# EAGLE board flextimus-prime (EAGLE 8.4.0)
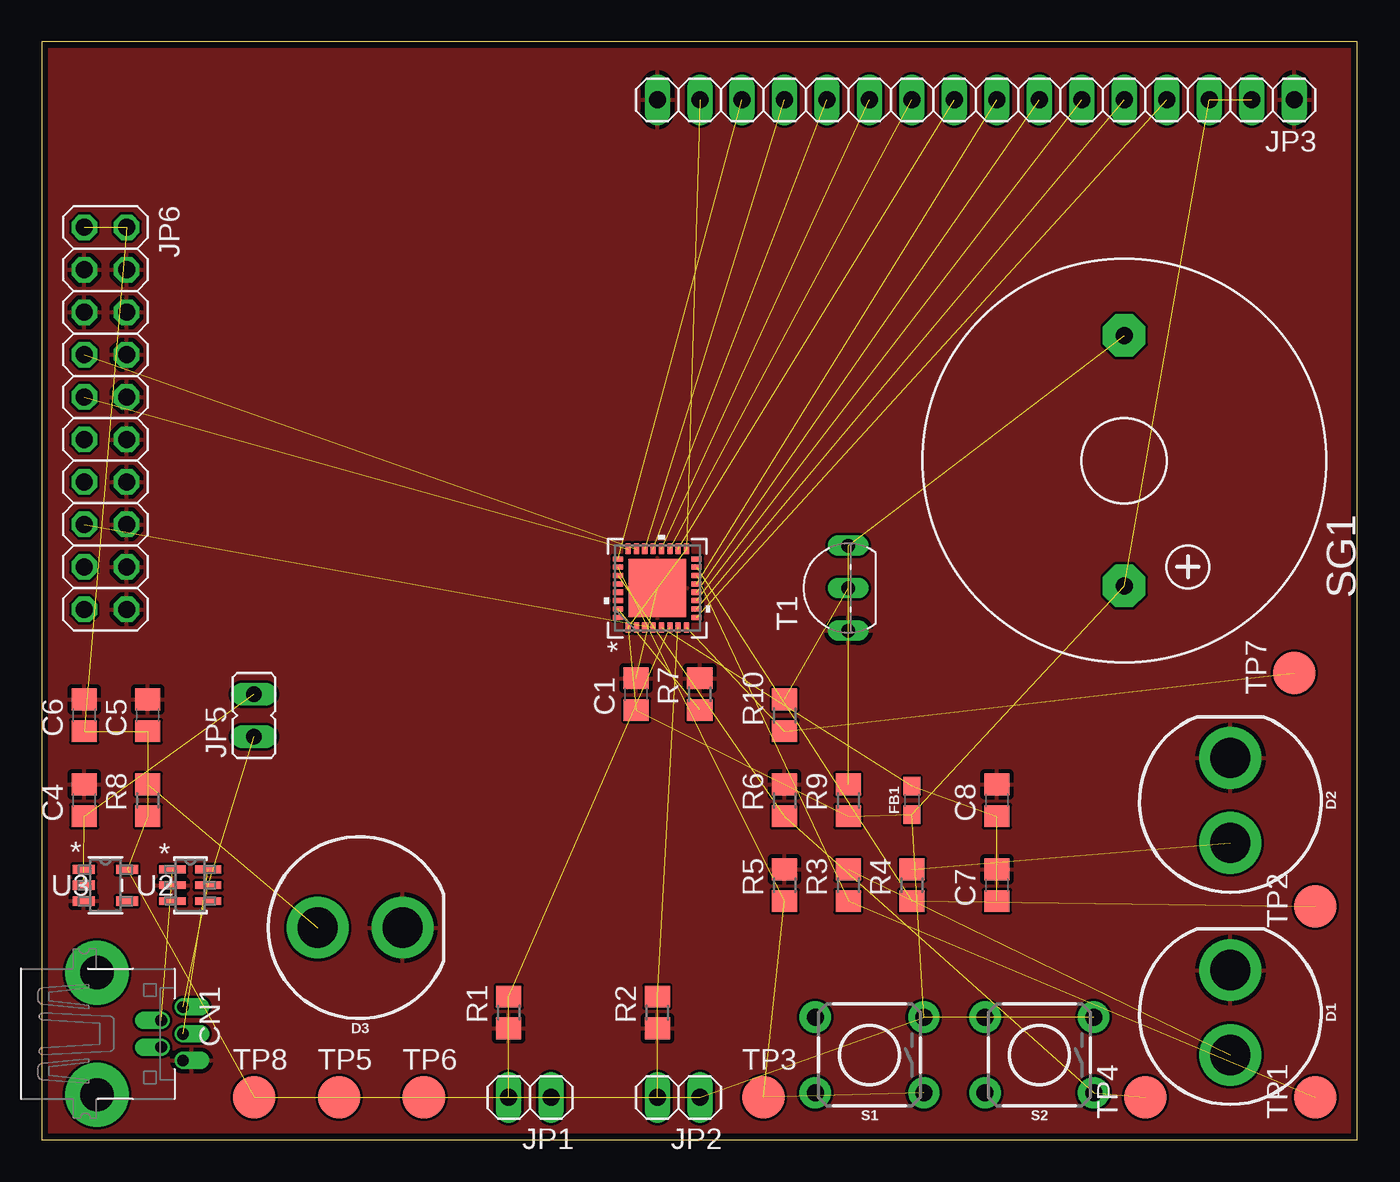
[diagram p0: board, top side]
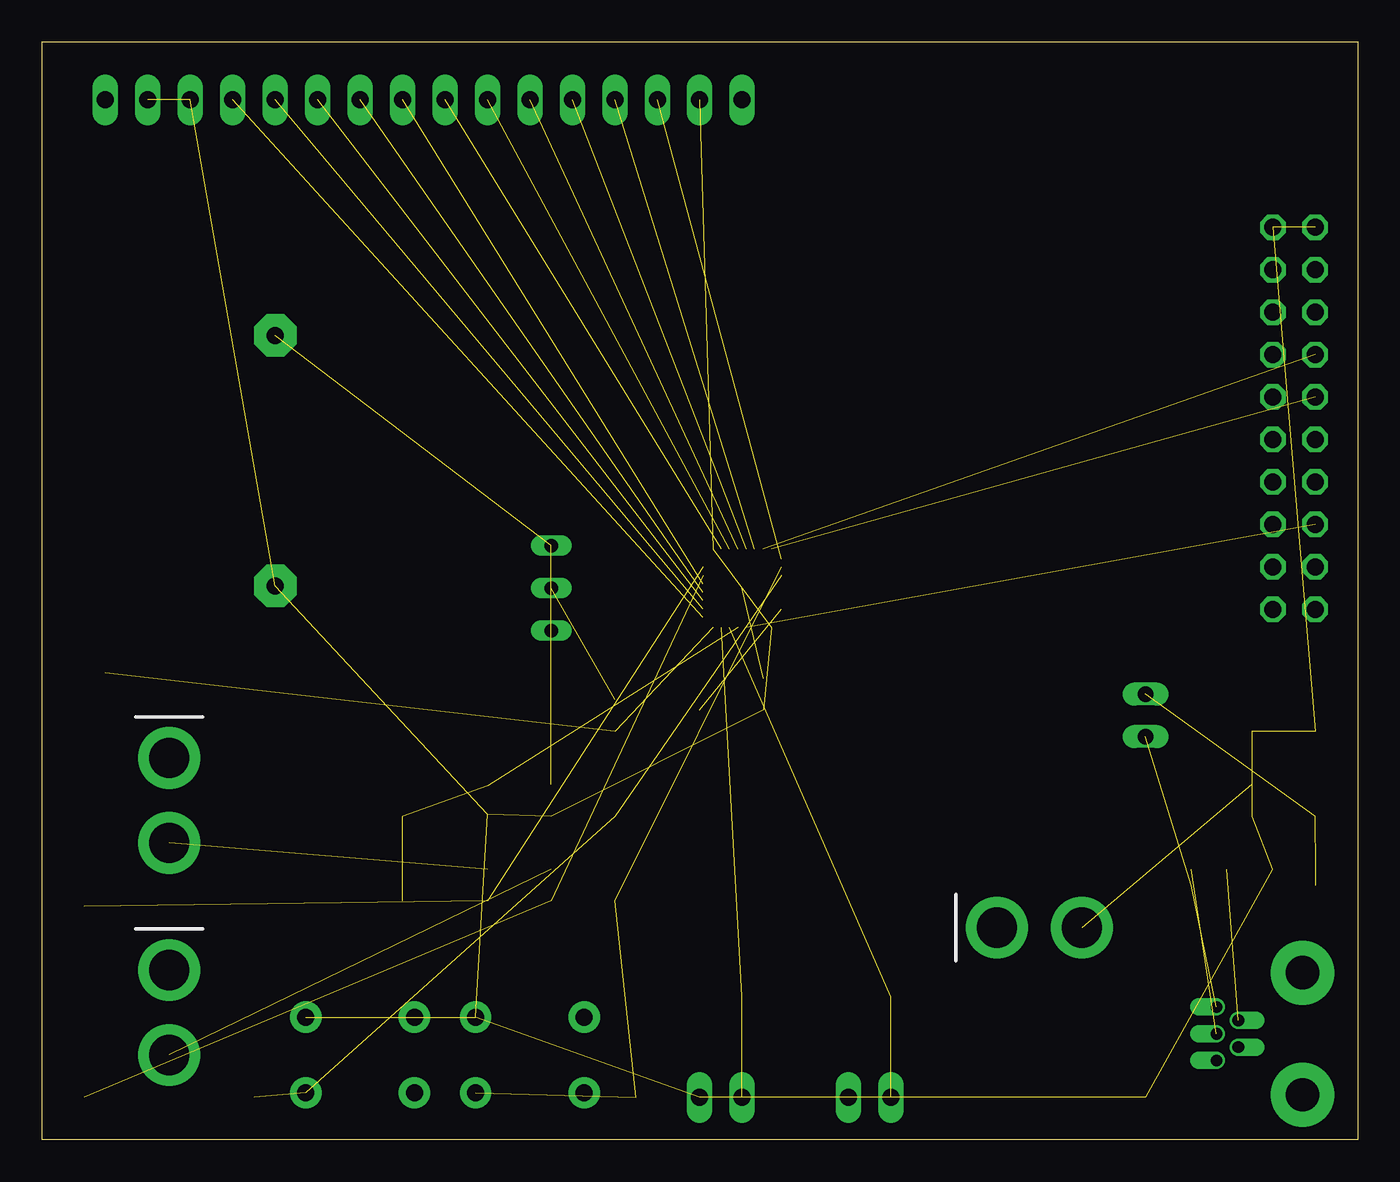
[diagram p1: board, bottom side, seen from below]

Size 78.72 x 65.71 mm. Coordinates in mm from the lower left corner, seen from the top.
Outline: 0,0 78.72,0 78.72,65.71 0,65.71 0,0
Copper layers (1*16): Top 0.0356mm / dielectric 1.5011mm / Bottom 0.0356mm
Design rules "osh-park-2-layers-design-rules": minimum track width 6mil, minimum drill 10mil, track to track 6mil, track to pad 6mil, pad to pad 6mil, via to via 6mil, smd to smd 6mil, copper to edge 15mil, drill to drill 6mil, minimum pad ring 7mil, minimum via ring 7mil, stop-mask expansion 3mil, vias tented up to drill 0mil, thermal gap 10mil

## Footprints (pad centres in the part's own frame; a part is rotated, then mirrored left to right if it is on the bottom)
C0805 = smd 1.3 x 1.5: 1 -0.95,0; 2 0.95,0
USB-MINIB-THM-MOLEX = drill 0.7 offset: D+ 0,9.72; D- -0.8,8.42; GND 1.6,9.72; ID 0.8,8.42; VBUS -1.6,9.72 | drill 2 pad 3.81: GND1 -3.65,4.57; GND4 3.65,4.57
LED_10MM = drill 2.4 pad 3.7: A 2.54,0; C -2.54,0
0603 = smd 1.1 x 1: 1 -0.85,0; 2 0.85,0
1X02 = drill 1.016 long: 1 -1.27,0; 2 1.27,0
1X16 = drill 1.016 long: 1 -19.05,0; 2 -16.51,0; 3 -13.97,0; 4 -11.43,0; 5 -8.89,0; 6 -6.35,0; 7 -3.81,0; 8 -1.27,0; 9 1.27,0; 10 3.81,0; 11 6.35,0; 12 8.89,0; 13 11.43,0; 14 13.97,0; 15 16.51,0; 16 19.05,0
JP1 = drill 0.914 long: 1 0,-1.27; 2 0,1.27
2X10 = drill 1.016 octagon: 1 -11.43,-1.27; 2 -11.43,1.27; 3 -8.89,-1.27; 4 -8.89,1.27; 5 -6.35,-1.27; 6 -6.35,1.27; 7 -3.81,-1.27; 8 -3.81,1.27; 9 -1.27,-1.27; 10 -1.27,1.27; 11 1.27,-1.27; 12 1.27,1.27; 13 3.81,-1.27; 14 3.81,1.27; 15 6.35,-1.27; 16 6.35,1.27; 17 8.89,-1.27; 18 8.89,1.27; 19 11.43,-1.27; 20 11.43,1.27
R0805 = smd 1.3 x 1.5: 1 -0.95,0; 2 0.95,0
TACTILE_SWITCH_PTH_6.0MM = drill 1.016 pad 1.88: 1 -3.251,2.261; 2 3.251,2.261; 3 -3.251,-2.261; 4 3.251,-2.261
F/CM04P = drill 1.016 pad 2.54 octagon: + 7.493,0; - -7.493,0
TO92-EBC-OVAL = drill 0.813 long: B 0,-1.27; C 2.54,-1.27; E -2.54,-1.27
B2,54 = smd 2.54 x 2.54: TP 0,0
UFQFPN32-5X5MM = smd 0.61 x 0.305: 1 -2.35,1.75; 2 -2.35,1.25; 3 -2.35,0.75; 4 -2.35,0.25; 5 -2.35,-0.25; 6 -2.35,-0.75; 7 -2.35,-1.25; 8 -2.35,-1.75; 17 2.35,-1.75; 18 2.35,-1.25; 19 2.35,-0.75; 20 2.35,-0.25; 21 2.35,0.25; 22 2.35,0.75; 23 2.35,1.25; 24 2.35,1.75 | smd 0.305 x 0.61: 9 -1.75,-2.35; 10 -1.25,-2.35; 11 -0.75,-2.35; 12 -0.25,-2.35; 13 0.25,-2.35; 14 0.75,-2.35; 15 1.25,-2.35; 16 1.75,-2.35; 25 1.75,2.35; 26 1.25,2.35; 27 0.75,2.35; 28 0.25,2.35; 29 -0.25,2.35; 30 -0.75,2.35; 31 -1.25,2.35; 32 -1.75,2.35 | smd 3.454 x 3.454: 33 0,0
SOT457 = smd 1.575 x 0.457: 1 -1.067,0.95; 2 -1.067,0; 3 -1.067,-0.95; 4 1.067,-0.95; 5 1.067,0; 6 1.067,0.95
SOT-23-5_MC = smd 1.321 x 0.559: 1 -1.295,0.95; 2 -1.295,0; 3 -1.295,-0.95; 4 1.295,-0.95; 5 1.295,0.95

## Placement (x,y rotation side)
C1  100n  [C0805]  35.56,26.67 90 top
C4  10uf  [C0805]  2.54,20.32 90 top
C5  10uf  [C0805]  6.35,25.4 90 top
C6  0.1uf  [C0805]  2.54,25.4 90 top
C7  10uf  [C0805]  57.15,15.24 90 top
C8  0.1uf  [C0805]  57.15,20.32 90 top
CN1  [USB-MINIB-THM-MOLEX]  -1.27,6.35 270 top
D1  [LED_10MM]  71.12,7.62 270 top
D2  [LED_10MM]  71.12,20.32 270 top
D3  [LED_10MM]  19.05,12.7 180 top
FB1  2.5kΩ/50mA  [0603]  52.07,20.32 90 top
JP1  [1X02]  29.21,2.54 180 top
JP2  [1X02]  38.1,2.54 180 top
JP3  [1X16]  55.88,62.23 180 top
JP5  [JP1]  12.7,25.4 0 top
JP6  [2X10]  3.81,43.18 270 top
R1  6k  [R0805]  27.94,7.62 90 top
R2  6k  [R0805]  36.83,7.62 90 top
R3  330  [R0805]  48.26,15.24 90 top
R4  330  [R0805]  52.07,15.24 90 top
R5  10k  [R0805]  44.45,15.24 90 top
R6  10k  [R0805]  44.45,20.32 90 top
R7  10k  [R0805]  39.37,26.67 90 top
R8  10k  [R0805]  6.35,20.32 90 top
R9  10k  [R0805]  48.26,20.32 90 top
R10  10k  [R0805]  44.45,25.4 90 top
S1  SPST  [TACTILE_SWITCH_PTH_6.0MM]  49.53,5.08 180 top
S2  SPST  [TACTILE_SWITCH_PTH_6.0MM]  59.69,5.08 180 top
SG1  F/CM04P  [F/CM04P]  64.77,40.64 270 top
T1  2N2222  [TO92-EBC-OVAL]  46.99,33.02 90 top
TP1  TPB2,54  [B2,54]  76.2,2.54 90 top
TP2  TPB2,54  [B2,54]  76.2,13.97 90 top
TP3  TPB2,54  [B2,54]  43.18,2.54 0 top
TP4  TPB2,54  [B2,54]  66.04,2.54 90 top
TP5  TPB2,54  [B2,54]  17.78,2.54 0 top
TP6  TPB2,54  [B2,54]  22.86,2.54 0 top
TP7  TPB2,54  [B2,54]  74.93,27.94 90 top
TP8  TPB2,54  [B2,54]  12.7,2.54 0 top
U1  STM32F042KXU  [UFQFPN32-5X5MM]  36.83,33.02 90 top
U2  IP4220CZ6  [SOT457]  8.89,15.24 0 top
U3  MCP1802T-3302I/OT  [SOT-23-5_MC]  3.81,15.24 0 top

## Library data of the parts
C1 C4-C8 R1-R10 = rcl
CN1 T1 = adafruit
D1-D3 = SparkFun-LED
FB1 = SparkFun-Coils; PROD_ID: NDUC-07859
JP1-JP3 JP6 = pinhead
JP5 = jumper
S1 S2 = SparkFun-Switches; PROD_ID: SWCH-08441; SF_SKU: COM-00097
SG1 = buzzer; OC_FARNELL: unknown; OC_NEWARK: unknown
TP1-TP8 = testpad
U1 = 411test; COPYRIGHT: Copyright C 2016 Accelerated Designs. All rights reserved; MANUFACTURER_PART_NUMBER: stm32f042kxu; VENDOR: STMicroelectronics
U2 = IP4220CZ6; MANUFACTURER_PART_NUMBER: IP4220CZ6; VENDOR: NXP
U3 = MCP1802T; MANUFACTURER_PART_NUMBER: MCP1802T3302IOT; VENDOR: Microchip

## Nets
3.3V: C1.1 C5.1 C6.1 FB1.1 JP1.1 JP2.1 JP3.2 JP3.3 JP3.15 JP6.1 JP6.2 R8.1 R9.1 S1.3 S2.3 SG1.+ TP8.TP U1.1 U1.17 U3.5
+5V: C4.1 JP5.2 U3.1 U3.2
AVDD: C7.1 C8.1 FB1.2 U1.5
BUT1: R5.1 S1.1 TP3.TP U1.26
BUT2: R6.1 S2.1 TP4.TP U1.27
BUZ: R10.1 TP7.TP U1.8
GND: C1.2 C4.2 C5.2 C6.2 C7.2 C8.2 CN1.GND D1.C D2.C D3.C JP3.1 JP3.16 JP6.3 JP6.4 JP6.5 JP6.6 JP6.8 JP6.10 JP6.12 JP6.14 JP6.16 JP6.18 JP6.20 R1.1 R2.1 R5.2 R6.2 R7.2 T1.E U1.33 U2.2 U3.3
N$1: JP1.2 R1.2 TP5.TP U1.6
N$2: JP2.2 R2.2 TP6.TP U1.7
N$3: R3.1 TP1.TP U1.14
N$4: JP3.14 U1.25
N$5: D1.A R3.2
N$6: D2.A R4.2
N$7: R9.2 SG1.- T1.C
N$8: R10.2 T1.B
N$9: D3.A R8.2
N$10: JP3.4 U1.9
N$11: JP3.5 U1.10
N$12: JP3.6 U1.11
N$13: JP3.7 U1.12
N$14: JP3.8 U1.13
N$15: JP3.9 U1.18
N$16: JP3.10 U1.19
N$17: JP3.11 U1.20
N$18: JP3.12 U1.21
N$19: JP3.13 U1.22
N$20: R7.1 U1.31
N$21: R4.1 TP2.TP U1.15
NRST: JP6.15 U1.4
SWCLK: JP6.9 U1.24
SWDIO: JP6.7 U1.23
USBM: CN1.D+ U2.6
USBP: CN1.D- U2.1
VBUS: CN1.VBUS JP5.1 U2.5

## Tracks (layer width: path | path; a pad name or v marks a point on that pad's centre or on a via)
3.3V  (19 unrouted)
+5V  (3 unrouted)
AVDD  (3 unrouted)
BUT1  (3 unrouted)
BUT2  (3 unrouted)
BUZ  (2 unrouted)
GND  (1 unrouted)
  pour Top: -1.27,67.31 -1.27,-1.27 80.01,-1.27 80.01,67.31
N$1  (3 unrouted)
N$2  (3 unrouted)
N$3  (2 unrouted)
N$4  (1 unrouted)
N$5  (1 unrouted)
N$6  (1 unrouted)
N$7  (2 unrouted)
N$8  (1 unrouted)
N$9  (1 unrouted)
N$10  (1 unrouted)
N$11  (1 unrouted)
N$12  (1 unrouted)
N$13  (1 unrouted)
N$14  (1 unrouted)
N$15  (1 unrouted)
N$16  (1 unrouted)
N$17  (1 unrouted)
N$18  (1 unrouted)
N$19  (1 unrouted)
N$20  (1 unrouted)
N$21  (2 unrouted)
NRST  (1 unrouted)
SWCLK  (1 unrouted)
SWDIO  (1 unrouted)
USBM  (1 unrouted)
USBP  (1 unrouted)
VBUS  (2 unrouted)